# EAGLE board sensor board - pannel (EAGLE 7.2.0)
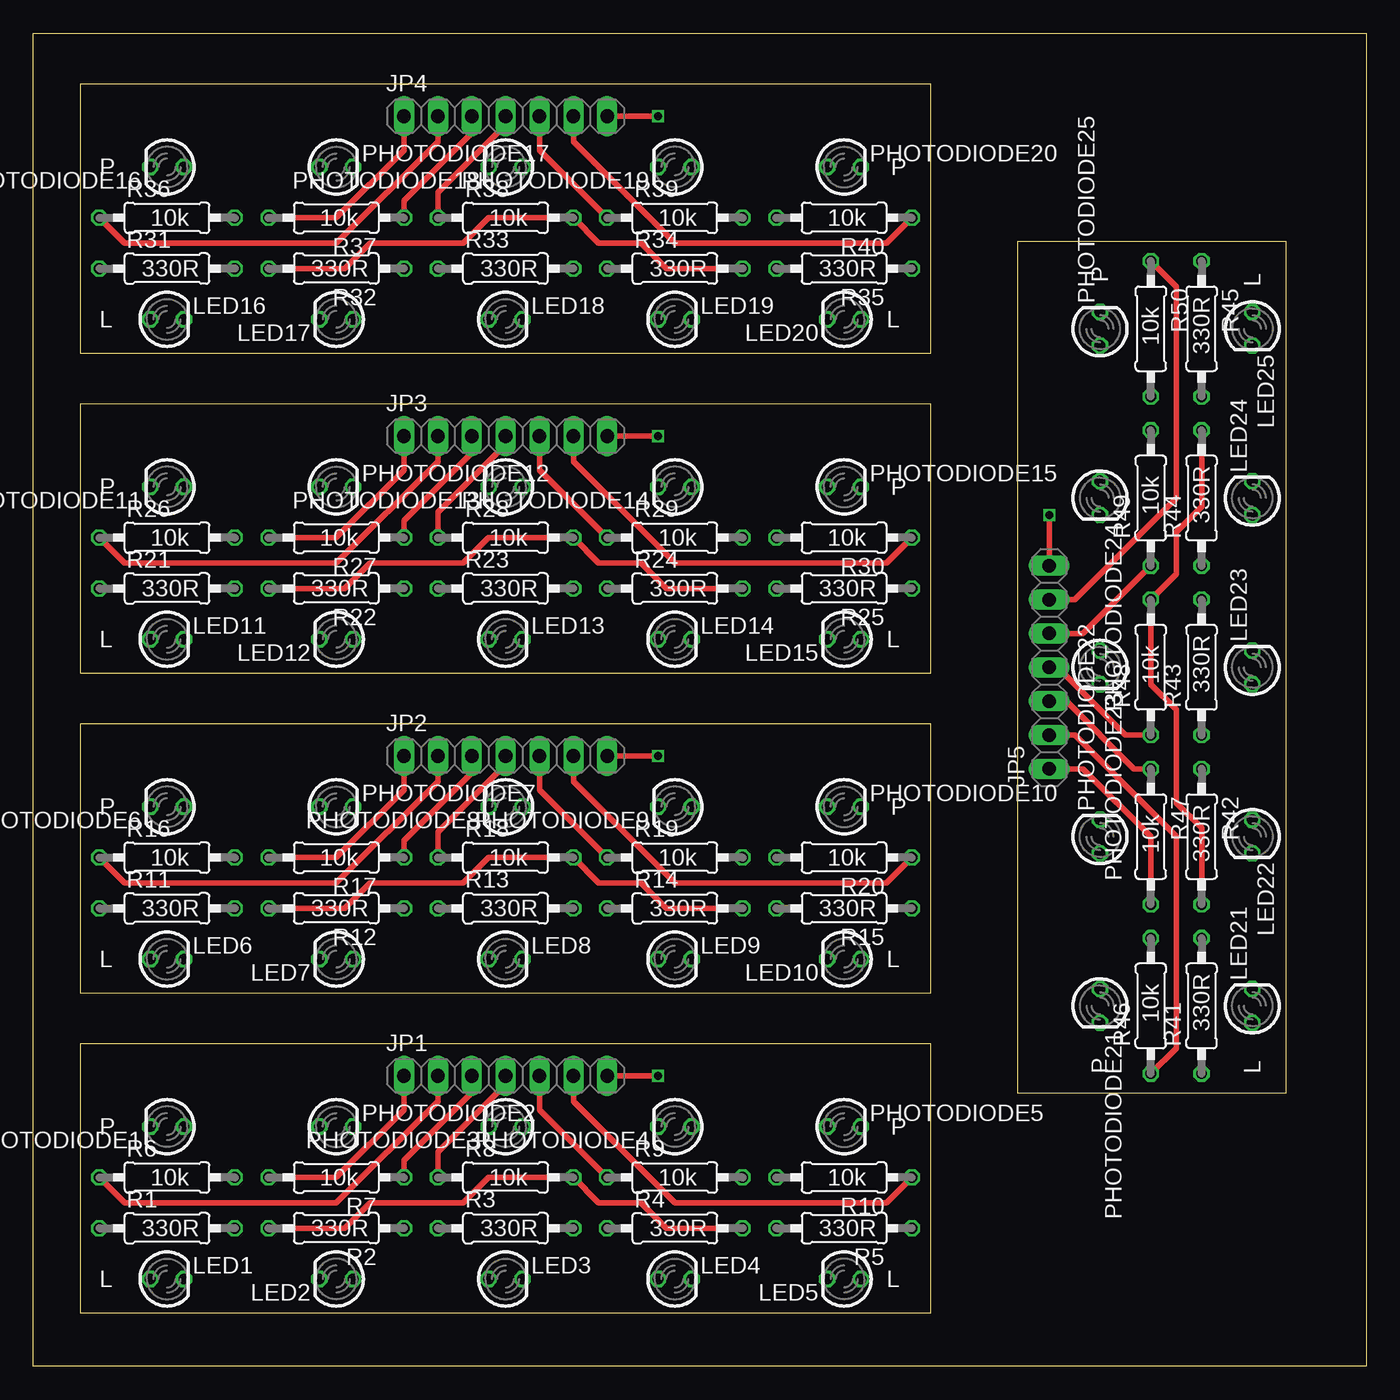
[diagram p0: board, top side]
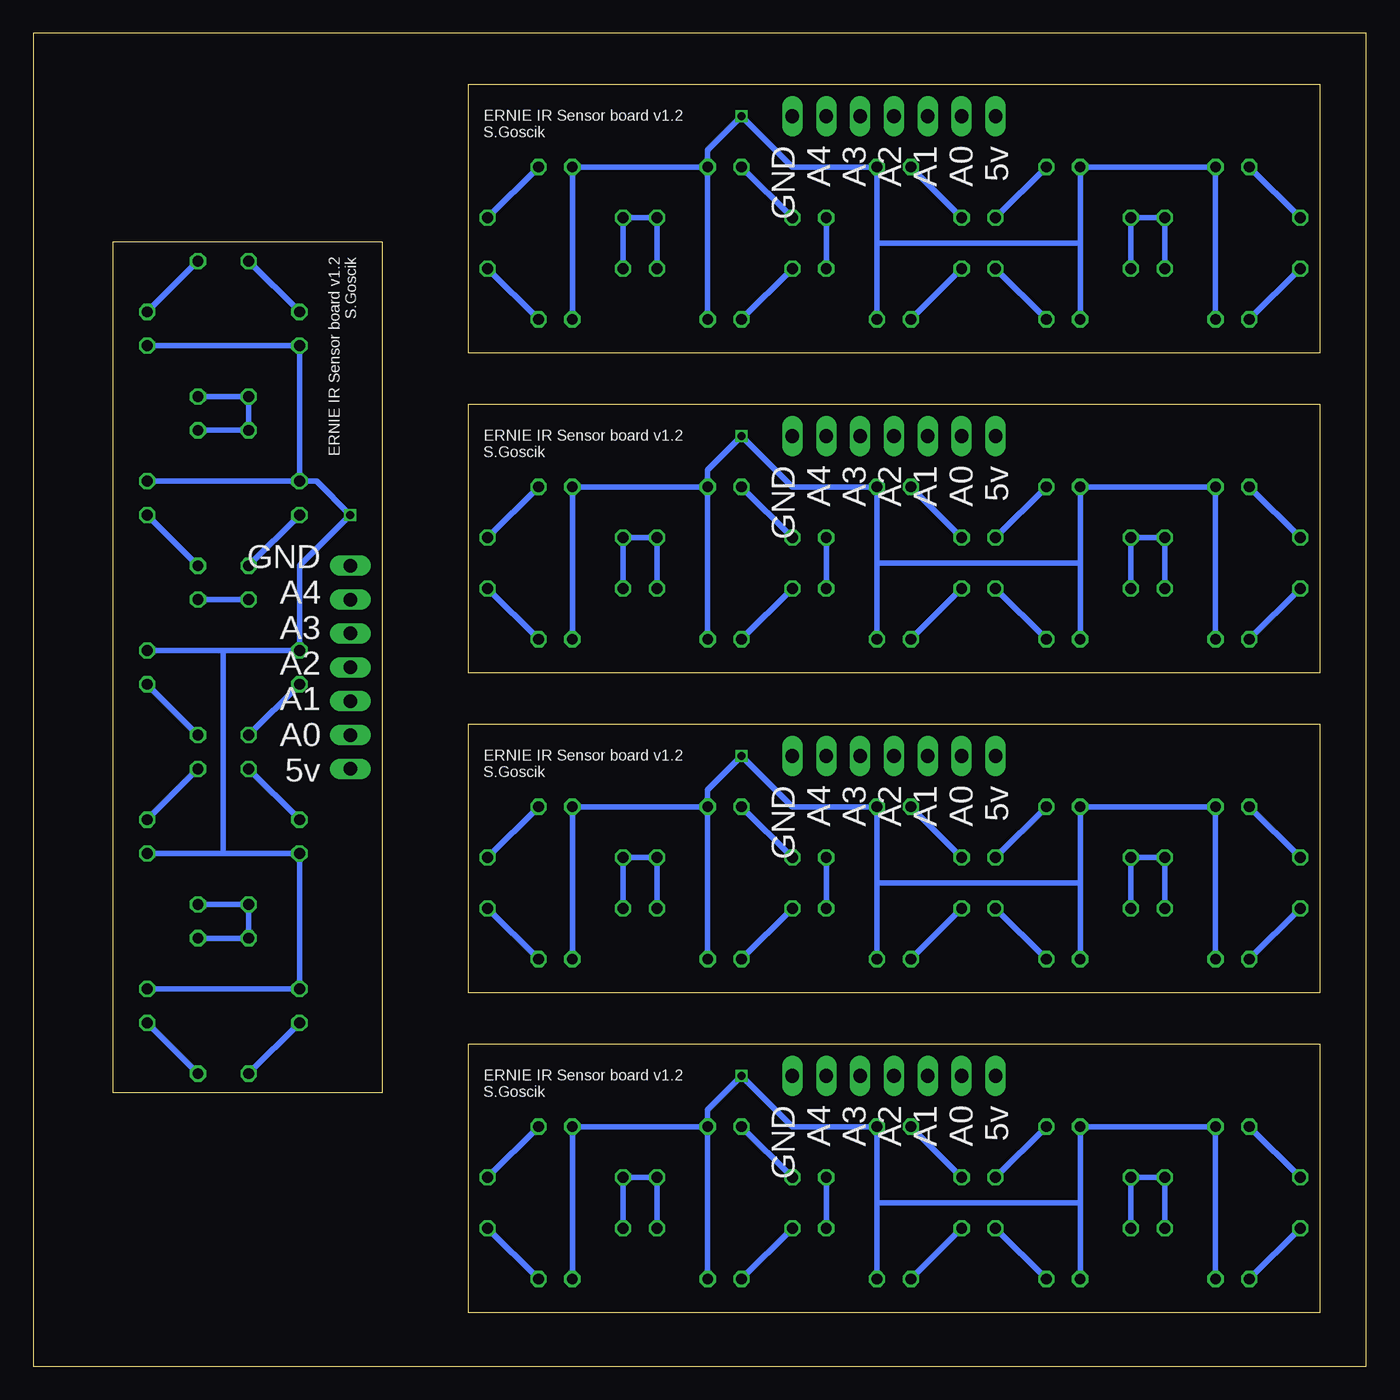
[diagram p1: board, bottom side, seen from below]

Size 100 x 100 mm. Coordinates in mm from the lower left corner, seen from the top.
Outline: 3.5,4 67.35,4 67.35,24.18 3.5,24.18 3.5,4
Outline: 0,0 0,100 100,100 100,0 0,0
Outline: 3.5,28 67.35,28 67.35,48.17 3.5,48.17 3.5,28
Outline: 3.5,52 67.35,52 67.35,72.17 3.5,72.17 3.5,52
Outline: 3.5,76 67.35,76 67.35,96.17 3.5,96.17 3.5,76
Outline: 94,20.5 94,84.35 73.83,84.35 73.83,20.5 94,20.5
Copper layers (1*2*15*16): Top 0.035mm / dielectric 0.2mm / Route2 0.035mm / dielectric 1.2mm / Route15 0.035mm / dielectric 0.2mm / Bottom 0.035mm
Design rules "Elecrow_PCB_eagle_rule": minimum track width 6mil, minimum drill 12mil, track to track 6mil, track to pad 8mil, pad to pad 12mil, via to via 6mil, smd to smd 0mil, copper to edge 20mil, drill to drill 10mil, minimum pad ring 6mil, minimum via ring 6mil, stop-mask expansion 0mil, vias tented up to drill 100mil, thermal gap 10mil

## Footprints (pad centres in the part's own frame; a part is rotated, then mirrored left to right if it is on the bottom)
1X07 = drill 1.016 long: 1 -7.62,0; 2 -5.08,0; 3 -2.54,0; 4 0,0; 5 2.54,0; 6 5.08,0; 7 7.62,0
LED3MM = drill 0.813 octagon: A -1.27,0; K 1.27,0
0207/10 = drill 0.813 octagon: 1 -5.08,0; 2 5.08,0

## Placement (x,y rotation side)
JP1  [1X07]  35.43,21.78 0 top
JP2  [1X07]  35.43,45.78 0 top
JP3  [1X07]  35.43,69.78 0 top
JP4  [1X07]  35.43,93.78 0 top
JP5  [1X07]  76.22,52.43 90 top
LED1  [LED3MM]  10.03,6.54 0 top
LED2  [LED3MM]  22.73,6.54 180 top
LED3  [LED3MM]  35.43,6.54 0 top
LED4  [LED3MM]  48.13,6.54 0 top
LED5  [LED3MM]  60.83,6.54 180 top
LED6  [LED3MM]  10.03,30.54 0 top
LED7  [LED3MM]  22.73,30.54 180 top
LED8  [LED3MM]  35.43,30.54 0 top
LED9  [LED3MM]  48.13,30.54 0 top
LED10  [LED3MM]  60.83,30.54 180 top
LED11  [LED3MM]  10.03,54.54 0 top
LED12  [LED3MM]  22.73,54.54 180 top
LED13  [LED3MM]  35.43,54.54 0 top
LED14  [LED3MM]  48.13,54.54 0 top
LED15  [LED3MM]  60.83,54.54 180 top
LED16  [LED3MM]  10.03,78.54 0 top
LED17  [LED3MM]  22.73,78.54 180 top
LED18  [LED3MM]  35.43,78.54 0 top
LED19  [LED3MM]  48.13,78.54 0 top
LED20  [LED3MM]  60.83,78.54 180 top
LED21  [LED3MM]  91.46,27.03 90 top
LED22  [LED3MM]  91.46,39.73 270 top
LED23  [LED3MM]  91.46,52.43 90 top
LED24  [LED3MM]  91.46,65.13 90 top
LED25  [LED3MM]  91.46,77.83 270 top
PHOTODIODE1  [LED3MM]  10.03,17.97 180 top
PHOTODIODE2  [LED3MM]  22.73,17.97 0 top
PHOTODIODE3  [LED3MM]  35.43,17.97 180 top
PHOTODIODE4  [LED3MM]  48.13,17.97 180 top
PHOTODIODE5  [LED3MM]  60.83,17.97 0 top
PHOTODIODE6  [LED3MM]  10.03,41.97 180 top
PHOTODIODE7  [LED3MM]  22.73,41.97 0 top
PHOTODIODE8  [LED3MM]  35.43,41.97 180 top
PHOTODIODE9  [LED3MM]  48.13,41.97 180 top
PHOTODIODE10  [LED3MM]  60.83,41.97 0 top
PHOTODIODE11  [LED3MM]  10.03,65.97 180 top
PHOTODIODE12  [LED3MM]  22.73,65.97 0 top
PHOTODIODE13  [LED3MM]  35.43,65.97 180 top
PHOTODIODE14  [LED3MM]  48.13,65.97 180 top
PHOTODIODE15  [LED3MM]  60.83,65.97 0 top
PHOTODIODE16  [LED3MM]  10.03,89.97 180 top
PHOTODIODE17  [LED3MM]  22.73,89.97 0 top
PHOTODIODE18  [LED3MM]  35.43,89.97 180 top
PHOTODIODE19  [LED3MM]  48.13,89.97 180 top
PHOTODIODE20  [LED3MM]  60.83,89.97 0 top
PHOTODIODE21  [LED3MM]  80.03,27.03 270 top
PHOTODIODE22  [LED3MM]  80.03,39.73 90 top
PHOTODIODE23  [LED3MM]  80.03,52.43 270 top
PHOTODIODE24  [LED3MM]  80.03,65.13 270 top
PHOTODIODE25  [LED3MM]  80.03,77.83 90 top
R1  [0207/10]  10.03,10.35 0 top
R2  [0207/10]  22.73,10.35 180 top
R3  [0207/10]  35.43,10.35 0 top
R4  [0207/10]  48.13,10.35 0 top
R5  [0207/10]  60.83,10.35 180 top
R6  [0207/10]  10.03,14.16 0 top
R7  [0207/10]  22.73,14.16 180 top
R8  [0207/10]  35.43,14.16 0 top
R9  [0207/10]  48.13,14.16 0 top
R10  [0207/10]  60.83,14.16 180 top
R11  [0207/10]  10.03,34.35 0 top
R12  [0207/10]  22.73,34.35 180 top
R13  [0207/10]  35.43,34.35 0 top
R14  [0207/10]  48.13,34.35 0 top
R15  [0207/10]  60.83,34.35 180 top
R16  [0207/10]  10.03,38.16 0 top
R17  [0207/10]  22.73,38.16 180 top
R18  [0207/10]  35.43,38.16 0 top
R19  [0207/10]  48.13,38.16 0 top
R20  [0207/10]  60.83,38.16 180 top
R21  [0207/10]  10.03,58.35 0 top
R22  [0207/10]  22.73,58.35 180 top
R23  [0207/10]  35.43,58.35 0 top
R24  [0207/10]  48.13,58.35 0 top
R25  [0207/10]  60.83,58.35 180 top
R26  [0207/10]  10.03,62.16 0 top
R27  [0207/10]  22.73,62.16 180 top
R28  [0207/10]  35.43,62.16 0 top
R29  [0207/10]  48.13,62.16 0 top
R30  [0207/10]  60.83,62.16 180 top
R31  [0207/10]  10.03,82.35 0 top
R32  [0207/10]  22.73,82.35 180 top
R33  [0207/10]  35.43,82.35 0 top
R34  [0207/10]  48.13,82.35 0 top
R35  [0207/10]  60.83,82.35 180 top
R36  [0207/10]  10.03,86.16 0 top
R37  [0207/10]  22.73,86.16 180 top
R38  [0207/10]  35.43,86.16 0 top
R39  [0207/10]  48.13,86.16 0 top
R40  [0207/10]  60.83,86.16 180 top
R41  [0207/10]  87.65,27.03 90 top
R42  [0207/10]  87.65,39.73 270 top
R43  [0207/10]  87.65,52.43 90 top
R44  [0207/10]  87.65,65.13 90 top
R45  [0207/10]  87.65,77.83 270 top
R46  [0207/10]  83.84,27.03 90 top
R47  [0207/10]  83.84,39.73 270 top
R48  [0207/10]  83.84,52.43 90 top
R49  [0207/10]  83.84,65.13 90 top
R50  [0207/10]  83.84,77.83 270 top

## Library data of the parts
JP1-JP5 = pinhead
LED1-LED25 PHOTODIODE1-PHOTODIODE25 = led
R1-R50 = rcl

## Nets
N$1: LED1.A R1.1
N$2: LED6.A R11.1
N$3: LED2.A R2.1
N$4: JP1.3 PHOTODIODE2.K R7.1
N$5: LED3.A R3.1
N$6: JP1.4 PHOTODIODE3.K R8.1
N$7: LED4.A R4.1
N$8: JP1.5 PHOTODIODE4.K R9.1
N$9: LED5.A R5.1
N$10: JP1.6 PHOTODIODE5.K R10.1
N$11: JP1.1 R1.2 R2.2 R3.2 R4.2 R5.2 R6.2 R7.2 R8.2 R9.2 R10.2
N$12: JP1.7 LED1.K LED2.K LED3.K LED4.K LED5.K PHOTODIODE1.A PHOTODIODE2.A PHOTODIODE3.A PHOTODIODE4.A PHOTODIODE5.A
N$13: JP1.2 PHOTODIODE1.K R6.1
N$14: LED7.A R12.1
N$15: JP2.3 PHOTODIODE7.K R17.1
N$16: LED8.A R13.1
N$17: JP2.4 PHOTODIODE8.K R18.1
N$18: LED9.A R14.1
N$19: JP2.5 PHOTODIODE9.K R19.1
N$20: LED10.A R15.1
N$21: JP2.6 PHOTODIODE10.K R20.1
N$22: JP2.1 R11.2 R12.2 R13.2 R14.2 R15.2 R16.2 R17.2 R18.2 R19.2 R20.2
N$23: JP2.7 LED6.K LED7.K LED8.K LED9.K LED10.K PHOTODIODE6.A PHOTODIODE7.A PHOTODIODE8.A PHOTODIODE9.A PHOTODIODE10.A
N$24: JP2.2 PHOTODIODE6.K R16.1
N$25: LED11.A R21.1
N$26: LED12.A R22.1
N$27: JP3.3 PHOTODIODE12.K R27.1
N$28: LED13.A R23.1
N$29: JP3.4 PHOTODIODE13.K R28.1
N$30: LED14.A R24.1
N$31: JP3.5 PHOTODIODE14.K R29.1
N$32: LED15.A R25.1
N$33: JP3.6 PHOTODIODE15.K R30.1
N$34: JP3.1 R21.2 R22.2 R23.2 R24.2 R25.2 R26.2 R27.2 R28.2 R29.2 R30.2
N$35: JP3.7 LED11.K LED12.K LED13.K LED14.K LED15.K PHOTODIODE11.A PHOTODIODE12.A PHOTODIODE13.A PHOTODIODE14.A PHOTODIODE15.A
N$36: JP3.2 PHOTODIODE11.K R26.1
N$37: LED16.A R31.1
N$38: LED17.A R32.1
N$39: JP4.3 PHOTODIODE17.K R37.1
N$40: LED18.A R33.1
N$41: JP4.4 PHOTODIODE18.K R38.1
N$42: LED19.A R34.1
N$43: JP4.5 PHOTODIODE19.K R39.1
N$44: LED20.A R35.1
N$45: JP4.6 PHOTODIODE20.K R40.1
N$46: JP4.1 R31.2 R32.2 R33.2 R34.2 R35.2 R36.2 R37.2 R38.2 R39.2 R40.2
N$47: JP4.7 LED16.K LED17.K LED18.K LED19.K LED20.K PHOTODIODE16.A PHOTODIODE17.A PHOTODIODE18.A PHOTODIODE19.A PHOTODIODE20.A
N$48: JP4.2 PHOTODIODE16.K R36.1
N$49: LED21.A R41.1
N$50: LED22.A R42.1
N$51: JP5.3 PHOTODIODE22.K R47.1
N$52: LED23.A R43.1
N$53: JP5.4 PHOTODIODE23.K R48.1
N$54: LED24.A R44.1
N$55: JP5.5 PHOTODIODE24.K R49.1
N$56: LED25.A R45.1
N$57: JP5.6 PHOTODIODE25.K R50.1
N$58: JP5.1 R41.2 R42.2 R43.2 R44.2 R45.2 R46.2 R47.2 R48.2 R49.2 R50.2
N$59: JP5.7 LED21.K LED22.K LED23.K LED24.K LED25.K PHOTODIODE21.A PHOTODIODE22.A PHOTODIODE23.A PHOTODIODE24.A PHOTODIODE25.A
N$60: JP5.2 PHOTODIODE21.K R46.1

## Tracks (layer width: path | path; a pad name or v marks a point on that pad's centre or on a via)
N$1
  Bottom 0.406: R1.1 LED1.A
N$2
  Bottom 0.406: R11.1 LED6.A
N$3
  Bottom 0.406: R2.1 LED2.A
N$4
  Top 0.406: JP1.3 32.89,20.51 27.81,15.43 R7.1
  Bottom 0.406: PHOTODIODE2.K R7.1
N$5
  Bottom 0.406: R3.1 LED3.A
N$6
  Top 0.406: JP1.4 35.43,21.14 30.35,16.07 R8.1
  Bottom 0.406: R8.1 PHOTODIODE3.K
N$7
  Bottom 0.406: R4.1 LED4.A
N$8
  Top 0.406: JP1.5 37.97,19.24 R9.1
  Bottom 0.406: PHOTODIODE4.K R9.1
N$9
  Bottom 0.406: LED5.A R5.1
N$10
  Top 0.406: R10.1 64.01,12.26 48.13,12.26 40.51,19.88 JP1.6
  Bottom 0.406: R10.1 PHOTODIODE5.K
N$11
  Top 0.406: JP1.1 27.81,19.24 22.73,14.16 R7.2 | R2.2 23.37,10.35 25.27,12.26 32.26,12.26 34.16,14.16 R8.2 42.42,12.26 45.59,12.26 47.5,10.35 R4.2
  Bottom 0.406: R1.2 R6.2 R7.2 R2.2 | R4.2 R9.2 R10.2 R5.2 | R8.2 R3.2
N$12  (via drill 0.6)
  Top 0.406: v46.86,21.78 JP1.7
  Bottom 0.406: LED1.K PHOTODIODE1.A PHOTODIODE2.A 21.46,12.26 | PHOTODIODE4.A PHOTODIODE5.A LED5.K | LED4.K PHOTODIODE4.A | 36.7,12.26 PHOTODIODE3.A 43.05,17.97 v46.86,21.78 49.4,19.24 PHOTODIODE4.A | 36.7,12.26 LED3.K | LED2.K 21.46,12.26 | 21.46,12.26 36.7,12.26
N$13
  Top 0.406: R6.1 6.86,12.26 22.73,12.26 30.35,19.88 JP1.2
  Bottom 0.406: R6.1 PHOTODIODE1.K
N$14
  Bottom 0.406: R12.1 LED7.A
N$15
  Top 0.406: JP2.3 32.89,44.51 27.81,39.43 R17.1
  Bottom 0.406: PHOTODIODE7.K R17.1
N$16
  Bottom 0.406: R13.1 LED8.A
N$17
  Top 0.406: JP2.4 35.43,45.15 30.35,40.06 R18.1
  Bottom 0.406: R18.1 PHOTODIODE8.K
N$18
  Bottom 0.406: R14.1 LED9.A
N$19
  Top 0.406: JP2.5 37.97,43.24 R19.1
  Bottom 0.406: PHOTODIODE9.K R19.1
N$20
  Bottom 0.406: LED10.A R15.1
N$21
  Top 0.406: R20.1 64.01,36.26 48.13,36.26 40.51,43.88 JP2.6
  Bottom 0.406: R20.1 PHOTODIODE10.K
N$22
  Top 0.406: JP2.1 27.81,43.24 22.73,38.16 R17.2 | R12.2 23.37,34.35 25.27,36.26 32.26,36.26 34.16,38.16 R18.2 42.42,36.26 45.59,36.26 47.5,34.35 R14.2
  Bottom 0.406: R11.2 R16.2 R17.2 R12.2 | R14.2 R19.2 R20.2 R15.2 | R18.2 R13.2
N$23  (via drill 0.6)
  Top 0.406: v46.86,45.78 JP2.7
  Bottom 0.406: LED6.K PHOTODIODE6.A PHOTODIODE7.A 21.46,36.26 | PHOTODIODE9.A PHOTODIODE10.A LED10.K | LED9.K PHOTODIODE9.A | 36.7,36.26 PHOTODIODE8.A 43.05,41.97 v46.86,45.78 49.4,43.24 PHOTODIODE9.A | 36.7,36.26 LED8.K | LED7.K 21.46,36.26 | 21.46,36.26 36.7,36.26
N$24
  Top 0.406: R16.1 6.86,36.26 22.73,36.26 30.35,43.88 JP2.2
  Bottom 0.406: R16.1 PHOTODIODE6.K
N$25
  Bottom 0.406: R21.1 LED11.A
N$26
  Bottom 0.406: R22.1 LED12.A
N$27
  Top 0.406: JP3.3 32.89,68.51 27.81,63.43 R27.1
  Bottom 0.406: PHOTODIODE12.K R27.1
N$28
  Bottom 0.406: R23.1 LED13.A
N$29
  Top 0.406: JP3.4 35.43,69.14 30.35,64.06 R28.1
  Bottom 0.406: R28.1 PHOTODIODE13.K
N$30
  Bottom 0.406: R24.1 LED14.A
N$31
  Top 0.406: JP3.5 37.97,67.24 R29.1
  Bottom 0.406: PHOTODIODE14.K R29.1
N$32
  Bottom 0.406: LED15.A R25.1
N$33
  Top 0.406: R30.1 64.01,60.26 48.13,60.26 40.51,67.88 JP3.6
  Bottom 0.406: R30.1 PHOTODIODE15.K
N$34
  Top 0.406: JP3.1 27.81,67.24 22.73,62.16 R27.2 | R22.2 23.37,58.35 25.27,60.26 32.26,60.26 34.16,62.16 R28.2 42.42,60.26 45.59,60.26 47.5,58.35 R24.2
  Bottom 0.406: R21.2 R26.2 R27.2 R22.2 | R24.2 R29.2 R30.2 R25.2 | R28.2 R23.2
N$35  (via drill 0.6)
  Top 0.406: v46.86,69.78 JP3.7
  Bottom 0.406: LED11.K PHOTODIODE11.A PHOTODIODE12.A 21.46,60.26 | PHOTODIODE14.A PHOTODIODE15.A LED15.K | LED14.K PHOTODIODE14.A | 36.7,60.26 PHOTODIODE13.A 43.05,65.97 v46.86,69.78 49.4,67.24 PHOTODIODE14.A | 36.7,60.26 LED13.K | LED12.K 21.46,60.26 | 21.46,60.26 36.7,60.26
N$36
  Top 0.406: R26.1 6.86,60.26 22.73,60.26 30.35,67.88 JP3.2
  Bottom 0.406: R26.1 PHOTODIODE11.K
N$37
  Bottom 0.406: R31.1 LED16.A
N$38
  Bottom 0.406: R32.1 LED17.A
N$39
  Top 0.406: JP4.3 32.89,92.51 27.81,87.43 R37.1
  Bottom 0.406: PHOTODIODE17.K R37.1
N$40
  Bottom 0.406: R33.1 LED18.A
N$41
  Top 0.406: JP4.4 35.43,93.14 30.35,88.06 R38.1
  Bottom 0.406: R38.1 PHOTODIODE18.K
N$42
  Bottom 0.406: R34.1 LED19.A
N$43
  Top 0.406: JP4.5 37.97,91.24 R39.1
  Bottom 0.406: PHOTODIODE19.K R39.1
N$44
  Bottom 0.406: LED20.A R35.1
N$45
  Top 0.406: R40.1 64.01,84.25 48.13,84.25 40.51,91.88 JP4.6
  Bottom 0.406: R40.1 PHOTODIODE20.K
N$46
  Top 0.406: JP4.1 27.81,91.24 22.73,86.16 R37.2 | R32.2 23.37,82.35 25.27,84.25 32.26,84.25 34.16,86.16 R38.2 42.42,84.25 45.59,84.25 47.5,82.35 R34.2
  Bottom 0.406: R31.2 R36.2 R37.2 R32.2 | R34.2 R39.2 R40.2 R35.2 | R38.2 R33.2
N$47  (via drill 0.6)
  Top 0.406: v46.86,93.78 JP4.7
  Bottom 0.406: LED16.K PHOTODIODE16.A PHOTODIODE17.A 21.46,84.25 | PHOTODIODE19.A PHOTODIODE20.A LED20.K | LED19.K PHOTODIODE19.A | 36.7,84.25 PHOTODIODE18.A 43.05,89.97 v46.86,93.78 49.4,91.24 PHOTODIODE19.A | 36.7,84.25 LED18.K | LED17.K 21.46,84.25 | 21.46,84.25 36.7,84.25
N$48
  Top 0.406: R36.1 6.86,84.25 22.73,84.25 30.35,91.88 JP4.2
  Bottom 0.406: R36.1 PHOTODIODE16.K
N$49
  Bottom 0.406: R41.1 LED21.A
N$50
  Bottom 0.406: R42.1 LED22.A
N$51
  Top 0.406: JP5.3 77.49,49.89 82.57,44.81 R47.1
  Bottom 0.406: PHOTODIODE22.K R47.1
N$52
  Bottom 0.406: R43.1 LED23.A
N$53
  Top 0.406: JP5.4 76.86,52.43 81.94,47.35 R48.1
  Bottom 0.406: R48.1 PHOTODIODE23.K
N$54
  Bottom 0.406: R44.1 LED24.A
N$55
  Top 0.406: JP5.5 78.76,54.97 R49.1
  Bottom 0.406: PHOTODIODE24.K R49.1
N$56
  Bottom 0.406: LED25.A R45.1
N$57
  Top 0.406: R50.1 85.75,81.01 85.75,65.13 78.12,57.51 JP5.6
  Bottom 0.406: R50.1 PHOTODIODE25.K
N$58
  Top 0.406: JP5.1 78.76,44.81 83.84,39.73 R47.2 | R42.2 87.65,40.37 85.75,42.27 85.75,49.26 83.84,51.16 R48.2 85.75,59.42 85.75,62.59 87.65,64.5 R44.2
  Bottom 0.406: R41.2 R46.2 R47.2 R42.2 | R44.2 R49.2 R50.2 R45.2 | R48.2 R43.2
N$59  (via drill 0.6)
  Top 0.406: v76.22,63.86 JP5.7
  Bottom 0.406: LED21.K PHOTODIODE21.A PHOTODIODE22.A 85.75,38.46 | PHOTODIODE24.A PHOTODIODE25.A LED25.K | LED24.K PHOTODIODE24.A | 85.75,53.7 PHOTODIODE23.A 80.03,60.05 v76.22,63.86 78.76,66.4 PHOTODIODE24.A | 85.75,53.7 LED23.K | LED22.K 85.75,38.46 | 85.75,38.46 85.75,53.7
N$60
  Top 0.406: R46.1 85.75,23.86 85.75,39.73 78.12,47.35 JP5.2
  Bottom 0.406: R46.1 PHOTODIODE21.K

## Text on the board
bSilk: GND / A4 / A3 / A2 / A1 / A0 / 5v | ERNIE IR Sensor board v1.2 / S.Goscik | ERNIE IR Sensor board v1.2 / S.Goscik | GND / A4 / A3 / A2 / A1 / A0 / 5v | ERNIE IR Sensor board v1.2 / S.Goscik | GND / A4 / A3 / A2 / A1 / A0 / 5v | GND / A4 / A3 / A2 / A1 / A0 / 5v | ERNIE IR Sensor board v1.2 / S.Goscik | GND / A4 / A3 / A2 / A1 / A0 / 5v | ERNIE IR Sensor board v1.2 / S.Goscik
tSilk: P | P | 10k | 10k | 10k | 10k | 10k | 330R | 330R | 330R | 330R | 330R | P | L | L | L | 10k | 330R | P | P | 10k | 330R | 10k | 10k | 10k | 10k | 10k | 330R | 330R | 330R | 330R | 330R | L | L | 10k | 330R | P | P | 10k | 10k | 10k | 10k | 10k | 10k | 330R | 330R | 330R | 330R | 330R | 330R | L | L | 10k | 330R | P | L | P | P | 10k | 10k | 10k | 10k | 10k | 330R | 330R | 330R | 330R | 330R | L | L